# EAGLE board module_SX1272 (EAGLE 8.7.0)
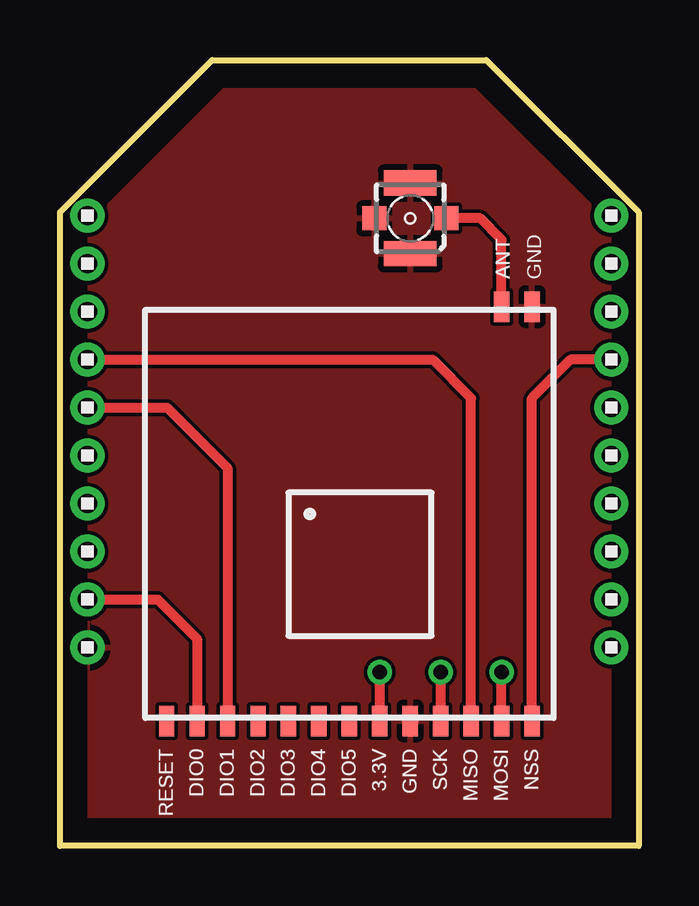
[diagram p0: board, top side]
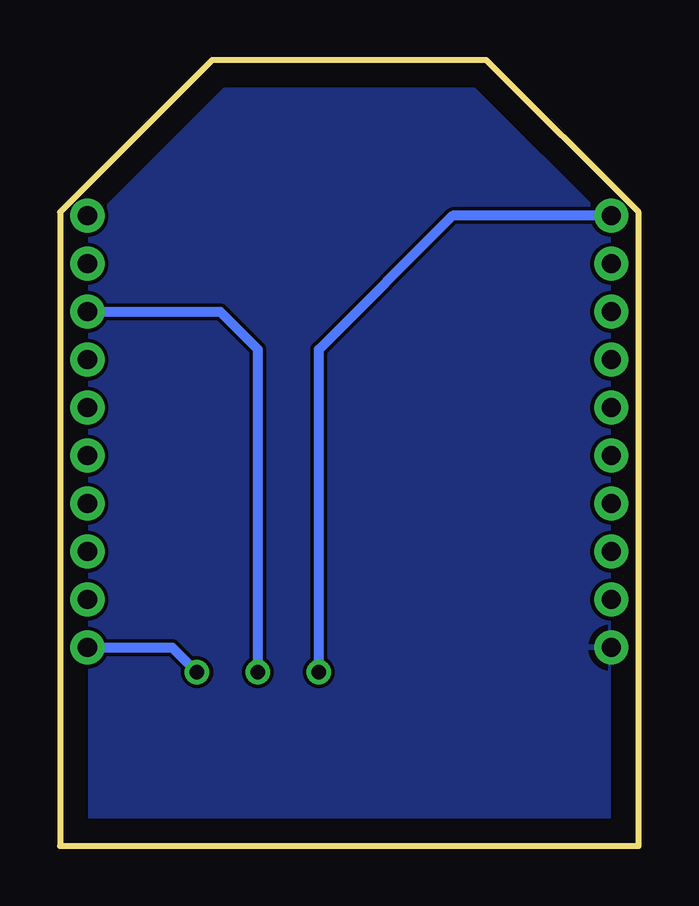
[diagram p1: board, bottom side, seen from below]

Size 24.13 x 32.77 mm. Coordinates in mm from the lower left corner, seen from the top.
Outline: 0,0 0,26.42 6.35,32.77 17.78,32.77 24.13,26.42 24.13,0 0,0
Copper layers (1*16): Top 0.035mm / dielectric 1.5mm / Bottom 0.035mm
Design rules "default": minimum track width 6mil, minimum drill 0.35mm, track to track 6mil, track to pad 6mil, pad to pad 6mil, via to via 6mil, smd to smd 6mil, copper to edge 40mil, drill to drill 6mil, minimum pad ring 10mil, minimum via ring 8mil, stop-mask expansion 4mil, vias tented up to drill 0mil, thermal gap 10mil

## Footprints (pad centres in the part's own frame; a part is rotated, then mirrored left to right if it is on the bottom)
SMD0,65-1,27 = smd 0.635 x 1.27: 1 0,0
1X10 = drill 0.8 pad 1.422: 1 -9,0; 2 -7,0; 3 -5,0; 4 -3,0; 5 -1,0; 6 1,0; 7 3,0; 8 5,0; 9 7,0; 10 9,0
734120110 = smd 1 x 1: 1 0,-1.5; S@1 0,1.5 | smd 1.05 x 2.2: S@2 -1.475,0; S@3 1.475,0

## Placement (x,y rotation side)
3.3V  [SMD0,65-1,27]  13.33,5.21 180 top
ANT  [SMD0,65-1,27]  18.42,22.48 180 top
DIO0  [SMD0,65-1,27]  5.71,5.21 180 top
DIO1  [SMD0,65-1,27]  6.99,5.21 180 top
DIO2  [SMD0,65-1,27]  8.25,5.21 180 top
DIO3  [SMD0,65-1,27]  9.52,5.21 180 top
DIO4  [SMD0,65-1,27]  10.79,5.21 180 top
DIO5  [SMD0,65-1,27]  12.06,5.21 0 top
GND  [SMD0,65-1,27]  14.6,5.21 180 top
GND_ANT  [SMD0,65-1,27]  19.69,22.48 180 top
LEFT1  1X10  [1X10]  1.14,17.27 270 top
MISO  [SMD0,65-1,27]  17.14,5.21 180 top
MOSI  [SMD0,65-1,27]  18.42,5.21 180 top
NSS  [SMD0,65-1,27]  19.69,5.21 180 top
RESET  [SMD0,65-1,27]  4.45,5.21 180 top
RIGHT1  1X10  [1X10]  22.99,17.27 270 top
SCK  [SMD0,65-1,27]  15.87,5.21 180 top
X1  734120110  [734120110]  14.6,26.16 90 top

## Library data of the parts
3.3V ANT DIO0 DIO1-DIO5 GND GND_ANT MISO MOSI NSS RESET SCK = wirepad
LEFT1 RIGHT1 = headers(2mm)
X1 = con-coax

## Nets
ANT: ANT.1 X1.1
GND: GND.1 GND_ANT.1 LEFT1.10 X1.S@1 X1.S@2 X1.S@3
INT0: DIO0.1 LEFT1.9
INT1: DIO1.1 LEFT1.5
SPI_CS: NSS.1 RIGHT1.4
SPI_MISO: LEFT1.4 MISO.1
SPI_MOSI: MOSI.1 RIGHT1.10
SPI_SCK: RIGHT1.3 SCK.1
VCC: 3.3V.1 LEFT1.1

## Tracks (layer width: path | path; a pad name or v marks a point on that pad's centre or on a via)
ANT
  Top 0.406: ANT.1 18.42,25.27 17.53,26.16 X1.1
GND
  pour Bottom: -0.51,-0.51 -0.51,26.67 6.1,33.27 18.03,33.27 24.64,26.67 24.64,-0.51
  pour Top: -0.25,-0.25 -0.25,26.54 6.22,33.02 17.91,33.02 24.38,26.54 24.38,-0.25
INT0
  Top 0.406: LEFT1.9 4.08,10.27 5.71,8.64 DIO0.1
INT1
  Top 0.406: DIO1.1 6.99,15.75 4.46,18.27 LEFT1.5
SPI_CS
  Top 0.406: NSS.1 19.69,18.67 21.29,20.27 RIGHT1.4
SPI_MISO
  Top 0.406: MISO.1 17.14,18.67 15.54,20.27 LEFT1.4
SPI_MOSI  (via drill 0.61)
  Top 0.406: MOSI.1 v18.42,7.24
  Bottom 0.406: RIGHT1.10 19.45,8.27 v18.42,7.24
SPI_SCK  (via drill 0.61)
  Top 0.406: SCK.1 v15.87,7.24
  Bottom 0.406: v15.87,7.24 15.87,20.7 17.45,22.27 RIGHT1.3
VCC  (via drill 0.61)
  Top 0.406: 3.3V.1 v13.33,7.24
  Bottom 0.406: v13.33,7.24 13.33,20.7 7.76,26.27 LEFT1.1

## Text on the board
_tNames: ANT | GND | RESET | DIO0 | DIO1 | DIO2 | DIO3 | DIO4 | DIO5 | 3.3V | GND | SCK | MISO | MOSI | NSS
HeatSink: PWR: / LOG: | 3.3 V / 3.3 V | SX1272